# Altium PCB PCB1.PcbDoc
Units mm, origin at the board's own origin, x right, y up, seen from the top; angles counter-clockwise.
Board outline 60 x 46.5 mm, 2 copper layers (Top Layer, Bottom Layer); 46 components, 48 nets, 188 pads, 39 vias.
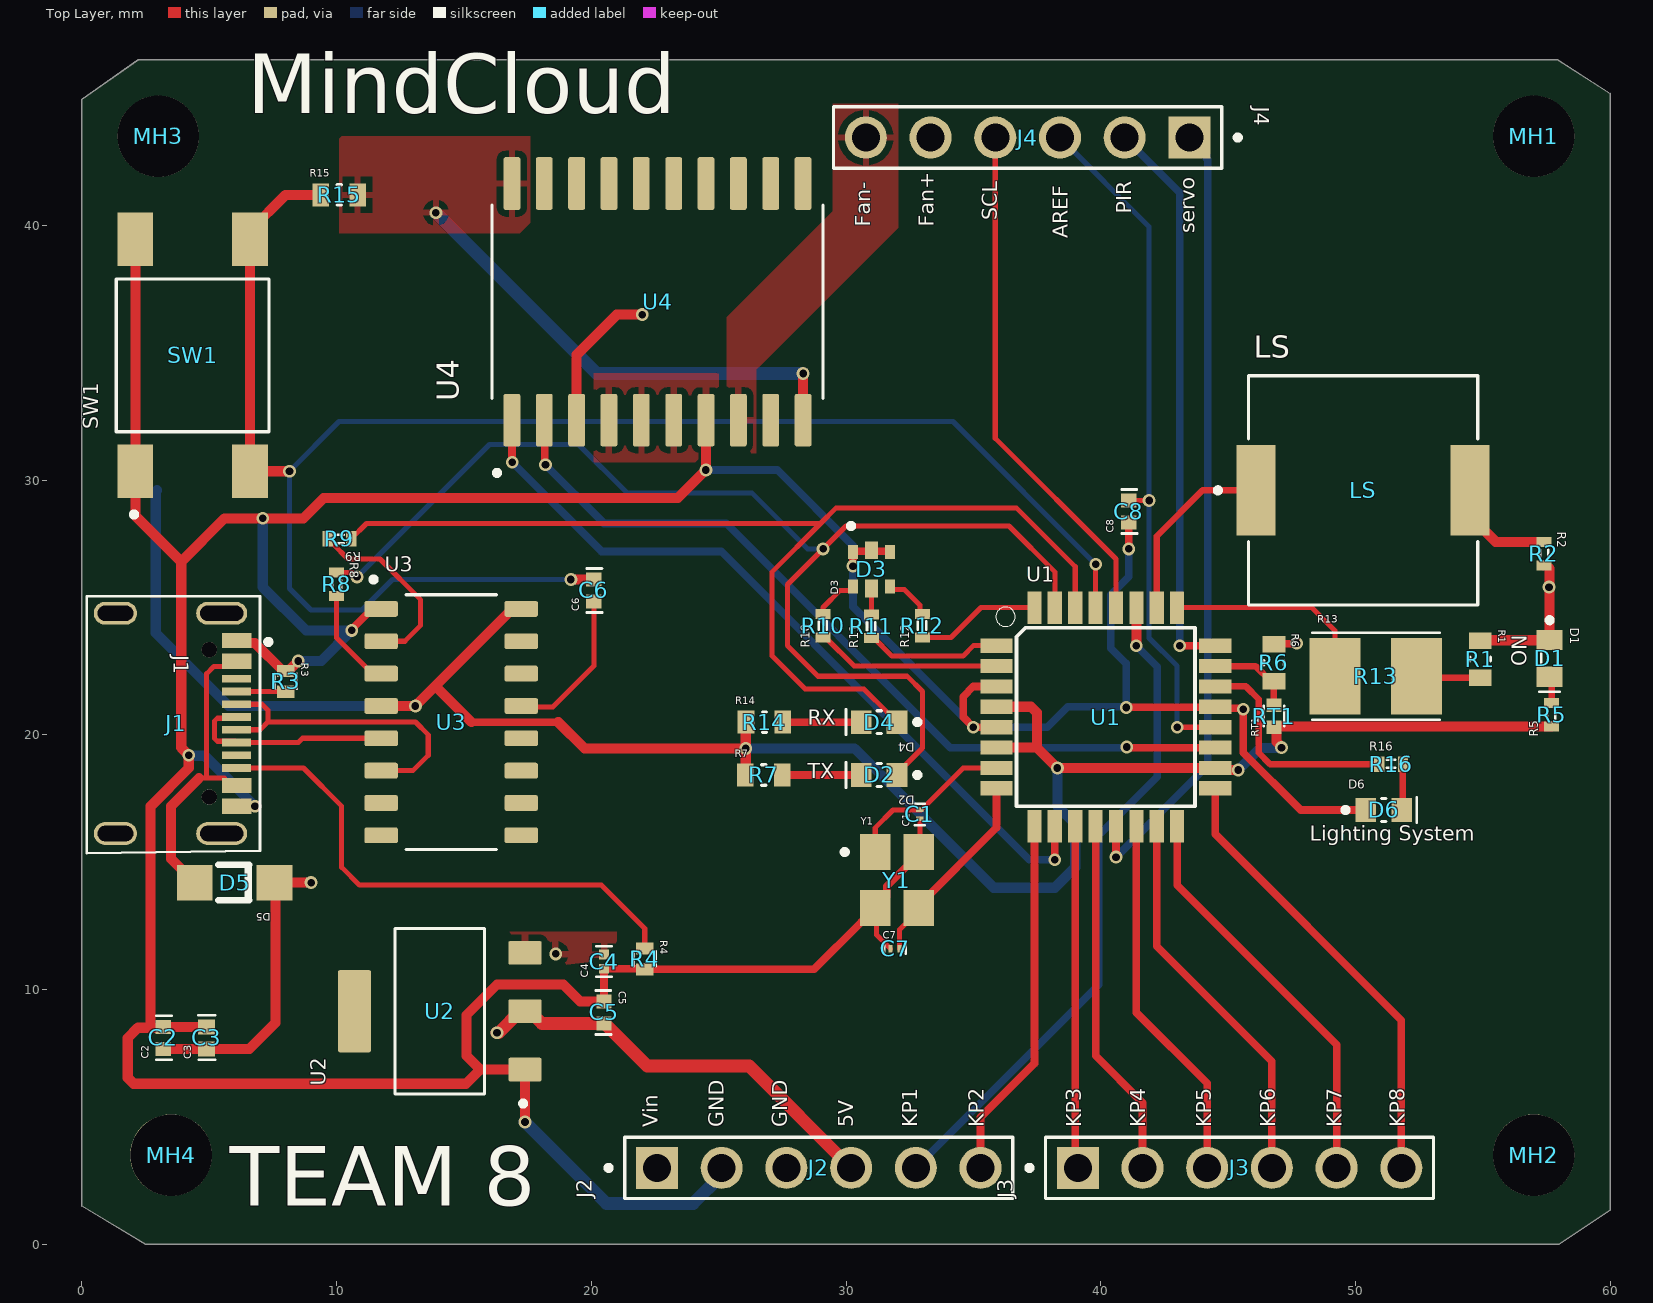
[diagram p0: Top Layer view]
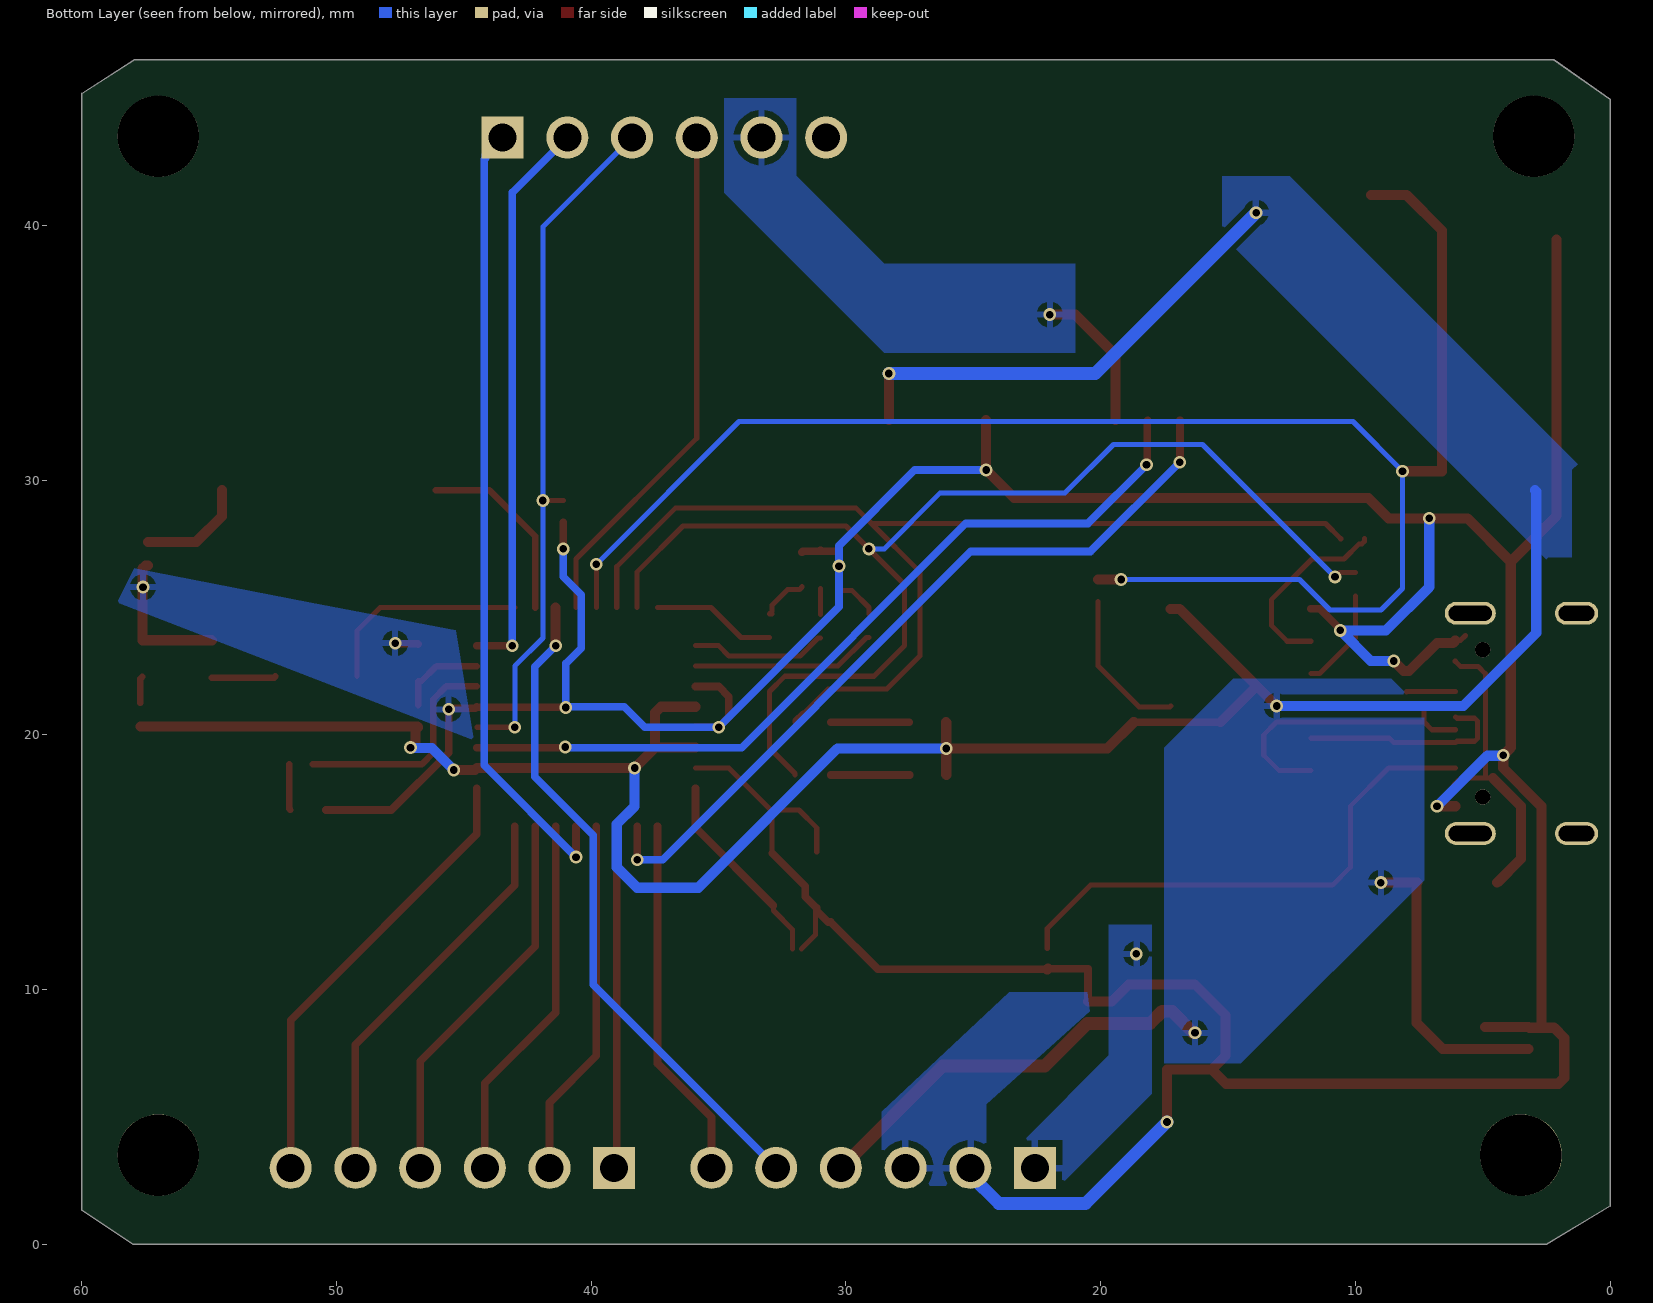
[diagram p1: Bottom Layer view, seen from below]
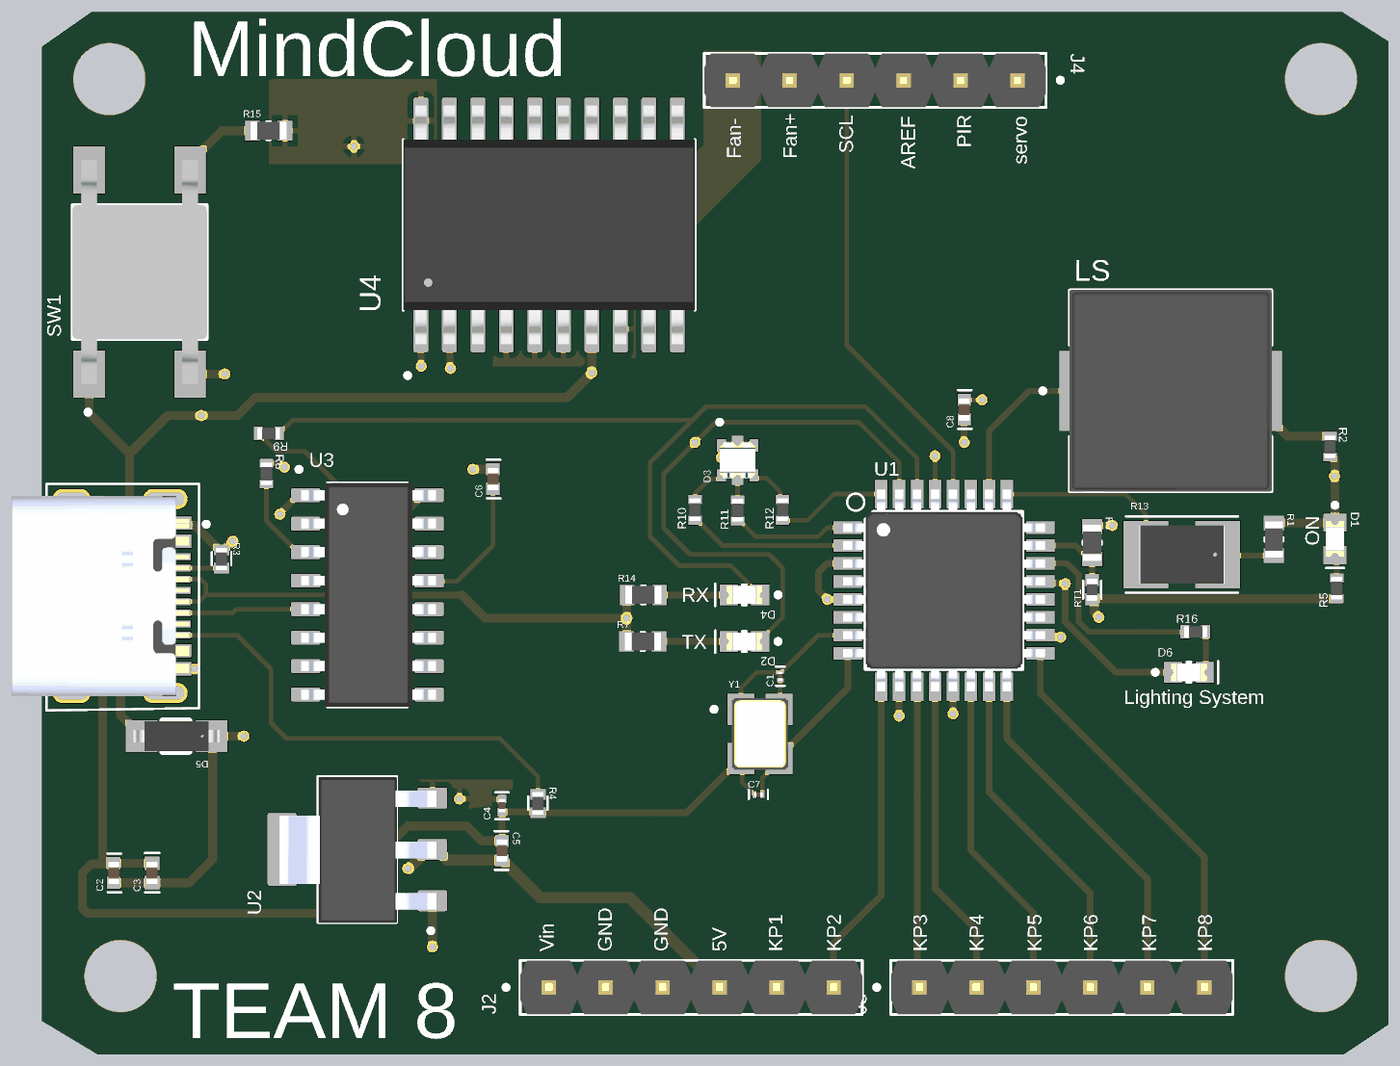
[diagram p2: 3D render of the assembled board from above, using the file's embedded part models]

## Layer stack, top to bottom
Top Solder: solder mask 0.0102, Solder Resist, Dk 3.5
Top Layer: signal copper 0.0356
Dielectric 1: dielectric 0.32, FR-4, Dk 4.8
Bottom Layer: signal copper 0.0356
Bottom Solder: solder mask 0.0102, Solder Resist, Dk 3.5

## Board outline
0,1.5 0,44.95 2.214,46.5 57.929,46.5 60,45.182 60,1.333 58,0 2.5,0

## Design rules (kind name [scope] priority, off if disabled: settings)
Clearance [All] p1: gap=0.1 ignorepadtopadclearanceinfootprint=TRUE except(0.15: SMDPad-SMDPad; 0.2: Arc-Via Track-Via; 0.28: Arc-THPad Track-THPad)
DiffPairsRouting [All] p1: maxlimit=0.254 minlimit=0.254 mostfreqgap=0.254 toplayer_minwidth=0.381 toplayer_maxwidth=0.381 toplayer_prefwidth=0.381 bottomlayer_minwidth=0.381 bottomlayer_maxwidth=0.381 bottomlayer_prefwidth=0.381 maxuncoupledlength=12.7
HoleSize [All] p1: absolutevalues=TRUE maxlimit=6.3 minlimit=0.15 maxpercent=80.000 minpercent=20.000
HoleToHoleClearance [All] p1: gap=0.2 allowstackedmicrovias=TRUE
MinimumSolderMaskSliver [All] p1: minsoldermaskwidth=0.1
PolygonConnect [All] p1: connectstyle=Relief reliefconductorwidth=0.254 reliefentries=4 polygonreliefangle="90 Angle" airgapwidth=0.254
RoutingVias [All] p1: holewidth=0.3 width=0.5 viastyle="Through Hole" minholewidth=0.15 minwidth=0.25 maxholewidth=0.7 maxwidth=0.9
SolderMaskExpansion [All] p1: expansion=0.038 istentingtop=FALSE
SupplyNets "Schematic Supply Nets_2" [InNet('+5')] p1: voltage=0.000
SupplyNets "Schematic Supply Nets_1" [InNet('GND')] p2: voltage=0.000
SupplyNets "Schematic Supply Nets" [InNet('VCC')] p3: voltage=0.000
Width [All] p1: maxlimit=0.5 minlimit=0.1 preferedwidth=0.3
26 further rules are at their usual default settings.

## Classes and differential pairs
differential pair DIFF: +DIFF_P -DIFF_N

## Components (designator, comment, footprint, x,y, rotation, side; value= is the part's Value field where it differs from the comment)
C1 "10pF" CAP10PF 32.9,16.875 r90 top
C2 "0.1uF" CAP0.1UF 3.2,8.1 r90 top
C3 "4.7uF" CAP4.7UF 4.9,8.1 r90 top
C4 "1uF" "CAP 1UF" 20.5,11.1 r90 top
C5 "0.1uF" CAP0.1UF 20.5,9.1 r270 top
C6 "0.1uF" CAP0.1UF 20.1,25.668 r90 top
C7 "10pF" CAP10PF 31.925,11.6 r0 top
C8 "0.1uF" CAP0.1UF 41.1,28.768 r90 top
D1 "yellow" "YELLOW LED" 57.625,23 r270 top
D2 "blue" "RED LED" 31.3,18.425 r180 top
D3 "RGB" "RGB LED" 31,26.5 r90 top
D4 "red" "RED LED" 31.3,20.5 r180 top
D5 "Zener" "ZENER 5.6V" 6,14.2 r180 top
D6 "blue" "RED LED" 51.113,17.05 r0 top
J1 "USB_C Connector" TYPE-C-31-M-12 3.7,20.45 r270 top
J2 "pinheader" "PINHEADER 6 PINS" 28.93,3 r90 top
J3 "pinheader" "PINHEADER 6 PINS" 45.45,3 r90 top
J4 "pinheader" "PINHEADER 6 PINS" 37.13,43.45 r270 top
LS "Buzzer" BUZZERS 50.3,29.6 r0 top
MH1 "mounting hole" "MOUNTING HOLE" 57,43.5 r0 top
MH2 "mounting hole" "MOUNTING HOLE" 57,3.5 r0 top
MH3 "mounting hole" "MOUNTING HOLE" 3,43.5 r0 top
MH4 "mounting hole" "MOUNTING HOLE" 3.5,3.5 r0 top
R1 "10kO" RES10K 54.9,22.975 r270 top
R2 "1kO" RES1K 57.4,27.1 r270 top
R3 "5.1kO" RES5.1KO 8,22.1 r270 top
R4 "5.1kO" RES5.1KO 22.1,11.2 r270 top
R5 "1kO" RES1K 57.7,20.8 r90 top
R6 "10kO" RES10K 46.8,22.825 r270 top
R7 "10kO" RES10K 26.775,18.425 r0 top
R8 "1kO" RES1K 10,25.9 r270 top
R9 "1kO" RES1K 10.1,27.7 r180 top
R10 "1kO" RES1K 29.1,24.3 r90 top
R11 "1kO" RES1K 31,24.275 r90 top
R12 "1kO" RES1K 33,24.3 r90 top
R13 "LDR" "LDR SENSOR" 50.8,22.3 r0 top
R14 "10kO" RES10K 26.8,20.5 r0 top
R15 "10kO" RES10K 10.1,41.2 r0 top
R16 "1kO" RES1K 51.413,18.85 r0 top
RT1 "Temp sensor" "TEMP SENSOR" 46.8,20.732 r90 top
SW1 "RESET" "PUSHBUTTON SWITCH" 4.35,34.9 r90 top
U1 "ATMEGA8A-AU" ATMEGA8A-AU 40.2,20.7 r0 top
U2 "Regulator-5V" REGULATOR-5V 14.05,9.15 r90 top
U3 "USB to UART converter" "USB TO UART CONVERTER" 14.4,20.8 r0 top
U4 "L293D" L293D 22.6,37 r90 top
Y1 "16Mhz" CRYSTAL16MHZ 32,14.3 r0 top

## Footprints (in the part's own frame and the unit in brackets; to place one, negate y for a bottom-side part, rotate by r counter-clockwise, add the part's x,y. Pads: shape width x height; smd on the part's side, far side on the other; paste and mask are expansions set on the pad)
ATMEGA8A-AU [mil] "8KB 1KB FLASH 23 2.7V~5.5V AVR 16MHz TQFP-32(7x7) Microcontrollers (MCU/MPU/SOC) ROHS"
  rect 50x22 smd: 1(-169,110.24) 2(-169,78.74) 3(-169,47.24) 4(-169,15.75) 5(-169,-15.75) 6(-169,-47.24) 7(-169,-78.74) 8(-169,-110.24) 17(169,-110.24) 18(169,-78.74) 19(169,-47.24) 20(169,-15.75) 21(169,15.75) 22(169,47.24) 23(169,78.74) 24(169,110.24)
  rect 22x50 smd: 9(-110.24,-169) 10(-78.74,-169) 11(-47.24,-169) 12(-15.75,-169) 13(15.75,-169) 14(47.24,-169) 15(78.74,-169) 16(110.24,-169) 25(110.24,169) 26(78.74,169) 27(47.24,169) 28(15.75,169) 29(-15.75,169) 30(-47.24,169) 31(-78.74,169) 32(-110.24,169)
  silkscreen extent -170,-138 138,170, body extent -177,-177 177,177, height 47
BUZZERS [mil] "65dB Passive (external drive) Piezoelectric 4kHz Buzzers ROHS"
  rect 60x140 smd: 1(-165.35,0) 2(165.35,0)
  silkscreen extent -228,-177 177,177, body extent -177,-177 177,177, height 75
CAP0.1UF [mm] "50V 100nF X7R ±10% 0402 Multilayer Ceramic Capacitors MLCC - SMD/SMT ROHS"
  rect 0.54x0.6 smd: 1(-0.432,0) 2(0.432,0)
  silkscreen extent -0.86,-0.33 0.86,0.28, body extent -0.5,-0.25 0.5,0.25, height 0.55
CAP4.7UF [mm] "10V 4.7uF X5R ±20% 0402 Multilayer Ceramic Capacitors MLCC - SMD/SMT ROHS"
  rect 0.6x0.67 smd: 1(-0.432,0) 2(0.432,0)
  silkscreen extent -0.86,-0.33 0.89,0.33, body extent -0.5,-0.25 0.5,0.25, height 0.65
CAP10PF [mm] "16V 10pF null ±5% 01005 Multilayer Ceramic Capacitors MLCC - SMD/SMT ROHS"
  rect 0.175x0.3 smd mask+0.038: 1(-0.178,0) 2(0.178,0)
  silkscreen extent -0.43,-0.2 0.42,0.2, body extent -0.2,-0.1 0.2,0.1, height 0.22
"CAP 1UF" [mm] "10V 1uF X5R ±20% 0201 Multilayer Ceramic Capacitors MLCC - SMD/SMT ROHS"
  rect 0.38x0.4 smd: 1(-0.28,0) 2(0.28,0)
  silkscreen extent -0.6,-0.3 0.6,0.3, body extent -0.3,-0.15 0.3,0.15, height 0.35
CRYSTAL16MHZ [mm] "1.8V~3.3V ±10ppm ±20ppm CMOS 16MHz SMD3225-4P Crystal Oscillators ROHS"
  rect 1.2x1.4 smd: 1(-0.85,1.1) 2(-0.85,-1.1) 3(0.85,-1.1) 4(0.85,1.1)
  silkscreen extent -2.15,1 -1.95,1.2, body extent -1.25,-1.6 1.25,1.6, height 0.8
L293D [mm] "SOIC-20-300mil Stepper Motor Driver ROHS"
  rrect25% 2.07x0.66 smd: 1(-4.645,5.715) 2(-4.645,4.445) 3(-4.645,3.175) 4(-4.645,1.905) 5(-4.645,0.635) 6(-4.645,-0.635) 7(-4.645,-1.905) 8(-4.645,-3.175) 9(-4.645,-4.445) 10(-4.645,-5.715) 11(4.645,-5.715) 12(4.645,-4.445) 13(4.645,-3.175) 14(4.645,-1.905) 15(4.645,-0.635) 16(4.645,0.635) 17(4.645,1.905) 18(4.645,3.175) 19(4.645,4.445) 20(4.645,5.715)
  silkscreen extent -6.81,-6.5 3.8,6.5, body extent -5.32,-6.5 5.32,6.5, height 2.64
"LDR SENSOR" [mm] "SMD,2.4x3.6mm Photoresistors ROHS"
  rect 2x3 smd: 1(-1.6,0) 2(1.6,0)
  silkscreen extent -2.5,-1.7 2.5,1.7, body extent -1.91,-1.3 1.91,1.3, height 0.66
"MOUNTING HOLE" [mm] "mounting hole 3.2mm inner diameter and 5.6mm outer"
  round 3.2 hole 3.2 paste-2539.97 mask-2539.97: 1(0,0)
"PINHEADER 6 PINS" [mm] "3A Direct Insert Policy 2.54mm 6P 5.84mm -65℃~+125℃ 3.05mm 2.54mm Single Row Phosphor Bronze Black Plugin,P=2.54mm Pin Headers ROHS"
  rect 1.65x1.65 / inner round 1.65 / far side rect 1.65x1.65 hole 1.1: 1(0,6.35)
  round 1.65 hole 1.1: 2(0,3.81) 3(0,1.27) 4(0,-1.27) 5(0,-3.81) 6(0,-6.35)
  silkscreen extent -1.2,-7.62 1.2,8.35, body extent -1.2,-7.62 1.2,7.62, height 8.38
"PUSHBUTTON SWITCH" [mm] "6mm 5mm Round Button 50mA Standing paste 6mm SPST 24V SMD Tactile Switches ROHS"
  rect 2.1x1.4 smd: 1(-4.55,2.25) 2(4.55,2.25) 3(-4.55,-2.25) 4(4.55,-2.25)
  silkscreen extent -6.35,-3 3,3, body extent -5,-3 5,3, height 5.07
"RED LED" [mm] "20mA 99mcd Colorless transparent lens -30℃~+85℃ 631nm Red 130° 62.5mW 2V 0603 LED Indication - Discrete ROHS"
  rect 0.81x0.93 smd: A(0.7,0) C(-0.7,0)
  silkscreen extent -1.6,-0.5 1.3,0.5, body extent -0.8,-0.4 0.8,0.4, height 0.8
REGULATOR-5V [mm] "1A 60dB@(120Hz) Fixed 5V Positive electrode 12V SOT-223 Voltage Regulators - Linear, Low Drop Out (LDO) Regulators ROHS"
  rrect15% 0.93x1.31 smd: 1(-2.29,-3.345) 2(0,-3.345) 3(2.29,-3.345)
  rrect15% 3.24x1.31 smd: 4(0,3.345)
  silkscreen extent -3.72,-3.37 3.25,1.75, body extent -3.28,-3.52 3.23,3.47, height 1.8
RES1K [mm] "100mW Thick Film Resistors ±100ppm/℃ ±1% 1kΩ 0402 Chip Resistor - Surface Mount ROHS"
  rect 0.4x0.6 smd: 1(-0.475,0) 2(0.45,0)
  silkscreen extent -0.18,-0.15 0.15,0.18, body extent -0.5,-0.25 0.5,0.25, height 0.35
RES5.1KO [mil] "100mW Thick Film Resistors ±5% ±200ppm/℃ 5.1kΩ 0402 Chip Resistor - Surface Mount ROHS"
  rect 18.7x27 smd: 1(-16,0) 2(16,0)
  silkscreen extent -12,-17 11,17, body extent -20,-10 20,10, height 14
RES10K [mm] "100mW Thick Film Resistors ±100ppm/℃ ±1% 10kΩ 0603 Chip Resistor - Surface Mount ROHS"
  rect 0.65x0.9 smd: 1(-0.725,0) 2(0.725,0)
  silkscreen extent -0.08,-0.4 0.08,0.4, body extent -0.8,-0.4 0.8,0.4, height 0.45
"RGB LED" [mm] "0606 RGB LEDs ROHS"
  rect 0.55x0.4 smd: 1(0.675,0.725) 2(-0.675,0.725) 5(0.675,-0.725) 6(-0.675,-0.725)
  rect 0.7x0.5 smd: 3(0.75,0) 4(-0.75,0)
  silkscreen extent 1.6,0.7 1.8,0.9, body extent -0.8,-0.8 0.8,0.8, height 0.5
"TEMP SENSOR" [mm] "100kΩ 32uA ±0.5% 4250K ±0.5% 0402 NTC Thermistors ROHS"
  rect 0.54x0.6 smd: 1(-0.432,0) 2(0.432,0)
  silkscreen extent -0.4,-0.4 0.4,0.4, body extent -0.5,-0.25 0.5,0.25, height 0.55
TYPE-C-31-M-12 [mm] "5A 1 16P Female Type-C SMD USB Connectors ROHS"
  rect 0.6x1.14 smd mask+0.05: A1_B12(-3.251,2.381) A4_B9(-2.438,2.381) B1_A12(3.251,2.381) B4_A9(2.438,2.381)
  rect 0.3x1.14 smd mask+0.05: A5(-1.25,2.369) A6(-0.25,2.369) A7(0.25,2.369) A8(1.25,2.369) B5(1.75,2.369) B6(0.75,2.369) B7(-0.75,2.369) B8(-1.75,2.369)
  oval 0.9x2 hole 0.6 slot 1.7 at 90 deg: S1(-4.325,1.789) S2(4.325,1.789)
  oval 0.9x1.7 hole 0.6 slot 1.4 at 90 deg: S3(-4.325,-2.381) S4(4.325,-2.381)
  round 0.6 hole 0.6 unplated: ""(-2.89,1.299) ""(2.89,1.299)
  silkscreen extent -5,-3.51 5.1,3.72, body extent -4.47,-5.04 4.47,2.86, height 3.31
"USB TO UART CONVERTER" [mm] "2Mbps Transceiver USB 2.0 SOP-16 USB Converters ROHS"
  rrect25% 1.31x0.62 smd: 1(-2.65,4.145) 2(-2.65,2.875) 3(-2.65,1.605) 4(-2.65,0.335) 5(-2.65,-0.935) 6(-2.65,-2.205) 7(-2.65,-3.475) 8(-2.65,-4.745) 9(2.85,-4.745) 10(2.85,-3.475) 11(2.85,-2.205) 12(2.85,-0.935) 13(2.85,0.335) 14(2.85,1.605) 15(2.85,2.875) 16(2.85,4.145)
  silkscreen extent -3.05,-5.3 1.88,5.4, body extent -2.85,-5.3 3.15,4.7, height 1.8
"YELLOW LED" [mm] "20mA 6mcd Colorless transparent lens -55℃~+85℃ 569nm Yellow Green 130° 100mW 2.1V 0603 LED Indication - Discrete ROHS"
  rect 0.8x1.016 smd: A(0.725,0) C(-0.725,0)
  silkscreen extent -1.6,-0.4 1.3,0.4, body extent -0.8,-0.4 0.8,0.4, height 0.8
"ZENER 5.6V" [mm] "Independent Type 5.2V~6V 500mW 5.6V SOD-123 Zener Diodes ROHS"
  rect 1.4x1.4 smd: 1(-1.562,0) 2(1.562,0)
  silkscreen extent -0.67,-0.7 0.64,0.7, body extent -1.92,-0.67 1.92,0.67, height 0.81

## Part data
C1 C7: library part Cap10pF, "16V 10pF null ±5% 01005 Multilayer Ceramic Capacitors MLCC - SMD/SMT ROHS", Manufacrurar="Murata Electronics", Manufacturer Part Number=GRM0225C1C100JA03L, Supplier Part Number=C710762, Supplier=LCSC
C2 C5 C6 C8: library part "Cap 0.1uF", "50V 100nF X7R ±10% 0402 Multilayer Ceramic Capacitors MLCC - SMD/SMT ROHS", Manufacrurar="Murata Electronics", Manufacturer Part Number=GRM155R71H104KE14D, Supplier Part Number=C77020, Supplier=LCSC
C3: library part "Cap 4.7uF", "10V 4.7uF X5R ±20% 0402 Multilayer Ceramic Capacitors MLCC - SMD/SMT ROHS", Manufacrurar="Murata Electronics", Manufacturer Part Number=GRM155R61A475MEAAD, Supplier Part Number=C335105, Supplier=LCSC
C4: library part "Cap 1uF", "10V 1uF X5R ±20% 0201 Multilayer Ceramic Capacitors MLCC - SMD/SMT ROHS", Manufacrurar="Murata Electronics", Manufacturer Part Number=GRM033R61A105ME44D, Supplier Part Number=C76935, Supplier=LCSC
D1: library part "yellow LED", "20mA 6mcd Colorless transparent lens -55℃~+85℃ 569nm Yellow Green 130° 100mW 2.1V 0603 LED Indication - Discrete ROHS", Manufacrurar=Lite-On, Manufacturer Part Number=LTST-C190GKT, Supplier Part Number=C125093, Supplier=LCSC
D2 D6: library part "blue LED", "20mA 104mcd Colorless transparent lens -20℃~+80℃ 465nm~475nm Blue 130° 76mW 3.3V 0805 LED Indication - Discrete ROHS", Manufacrurar=Lite-On, Manufacturer Part Number=LTST-C170TBKT, Supplier Part Number=C98222, Supplier=LCSC
D3: library part "RGB LED", "0606 RGB LEDs ROHS", Manufacrurar="Everlight Elec", Manufacturer Part Number=19-337C/RSBHGHC-A88/4T, Supplier Part Number=C3019536, Supplier=LCSC
D4: library part "red LED", "20mA 99mcd Colorless transparent lens -30℃~+85℃ 631nm Red 130° 62.5mW 2V 0603 LED Indication - Discrete ROHS", Manufacrurar=Lite-On, Manufacturer Part Number=LTST-C190KRKT, Supplier Part Number=C94869, Supplier=LCSC
D5: library part "Zener 5.6V", "Independent Type 5.2V~6V 500mW 5.6V SOD-123 Zener Diodes ROHS", Manufacturer="Diodes Incorporated", Manufacturer Part Number=BZT52C5V6-7-F, Supplier Part Number=C397930, Supplier=LCSC
J1: library part TYPE-C-31-M-12, "5A 1 16P Female Type-C SMD USB Connectors ROHS", Manufacturer="Korean Hroparts Elec", Supplier Part Number=C165948, Manufacturar Part Number=TYPE-C-31-M-12, Supplier=LCSC
J2 J3 J4: library part "pinheader 6 pins", "3A Direct Insert Policy 2.54mm 6P 5.84mm -65℃~+125℃ 3.05mm 2.54mm Single Row Phosphor Bronze Black Plugin,P=2.54mm Pin Headers ROHS", Manufacrurar="Amphenol ICC", Manufacturer Part Number=68001-106HLF, Supplier Part Number=C3330006, Supplier=LCSC
LS: library part Buzzers, "65dB Passive (external drive) Piezoelectric 4kHz Buzzers ROHS", Manufacrurar="Murata Electronics", Manufacturer Part Number=PKMCS0909E4000-R1, Supplier Part Number=C910763, Supplier=LCSC
MH1 MH2 MH3 MH4: "mounting hole 3.2mm inner diameter and 5.6mm outer"
R1 R6 R7 R14 R15: library part "Res 10k", "100mW Thick Film Resistors ±100ppm/℃ ±1% 10kΩ 0603 Chip Resistor - Surface Mount ROHS", Manufacrurar=PANASONIC, Manufacturer Part Number=ERJ3EKF1002V, Supplier Part Number=C191124, Supplier=LCSC
R2 R5 R8 R9 R10 R11 R12 R16: library part "Res 1k", "100mW Thick Film Resistors ±100ppm/℃ ±1% 1kΩ 0402 Chip Resistor - Surface Mount ROHS", Manufacrurar=PANASONIC, Manufacturer Part Number=ERJ2RKF1001X, Supplier Part Number=C191124, Supplier=LCSC
R3 R4: library part Res5.1kO, "100mW Thick Film Resistors ±5% ±200ppm/℃ 5.1kΩ 0402 Chip Resistor - Surface Mount ROHS", Manufacrurar=PANASONIC, Manufacturer Part Number=ERJ2GEJ512X, Supplier Part Number=C413002, Supplier=LCSC
R13: library part "LDR sensor", "SMD,2.4x3.6mm Photoresistors ROHS", Manufacrurar="JCHL(Shenzhen Jing Chuang He Li Tech)", Manufacturer Part Number=GT36528, Supplier Part Number=C2904881, Supplier=LCSC
RT1: "100kΩ 32uA ±0.5% 4250K ±0.5% 0402 NTC Thermistors ROHS", Manufacrurar="Murata Electronics", Manufacturer Part Number=NCU15WF104D60RC, Supplier Part Number=C426654, Supplier=LCSC
SW1: library part "Pushbutton Switch", "6mm 5mm Round Button 50mA Standing paste 6mm SPST 24V SMD Tactile Switches ROHS", Manufacrurar="TE Connectivity", Manufacturer Part Number=4-1437565-2, Supplier Part Number=C86487, Supplier=LCSC
U1: "8KB 1KB FLASH 23 2.7V~5.5V AVR 16MHz TQFP-32(7x7) Microcontrollers (MCU/MPU/SOC) ROHS", Manufacrurar="Microchip Tech", Supplier Part Number=C16190, Manufacturer Part Number=ATMEGA8A-AU, Supplier=LCSC
U2: "1A 60dB@(120Hz) Fixed 5V Positive electrode 12V SOT-223 Voltage Regulators - Linear, Low Drop Out (LDO) Regulators ROHS", Manufacrurar="UMW(Youtai Semiconductor Co., Ltd.)", Manufacturer Part Number=AMS1117-5.0, Supplier Part Number=C347223, Supplier=LCSC
U3: "2Mbps Transceiver USB 2.0 SOP-16 USB Converters ROHS", Manufacrurar="WCH(Jiangsu Qin Heng)", Manufacturer Part Number=CH340C, Supplier Part Number=C84681, Supplier=LCSC
U4: "SOIC-20-300mil Stepper Motor Driver ROHS", Manufacrurar=STMicroelectronics, Manufacturer Part Number=L293DD013TR, Supplier Part Number=C21610, Supplier=LCSC
Y1: library part Crystal16Mhz, "1.8V~3.3V ±10ppm ±20ppm CMOS 16MHz SMD3225-4P Crystal Oscillators ROHS", Manufacrurar="YXC Crystal Oscillators", Manufacturer Part Number=OT2EL4C4JI-111OLP-16M, Supplier Part Number=C5189452, Supplier=LCSC

## Via types
v1: diameter 0.5, hole 0.3, Top Layer to Bottom Layer, 39 vias

## Nets (pads, with @x,y where several pads share a name; then routed paths per layer and width w, separated by ;. In a path a pad name is that pad's centre, name@x,y a point inside that pad or via, vN(x,y) a via of type N, cw(c..) or ccw(c..) an arc to the next point about the centre after c; other vN are vias at no path point)
+5: C2.1 C3.1 C5.2 D5.1 J2.4 R5.1 R7.1 R14.1 R15.2 RT1.1 U1.4 U1.6 U1.18 U2.2 U3.4 U3.16 U4.10 U4.20 | length 133.4
  Top Layer w0.3: 15.3,20.5 18.7,20.5
  Top Layer w0.4: C2.1 C3.1 6.568,7.668 7.6,8.7 7.6,14.162 D5.1 v1(9,14.2) ; U3.4 v1(13.095,21.135) 13.88,21.92 ; 15.3,20.5 13.88,21.92 ; U3.16 16.905,24.945 13.88,21.92 ; 18.7,20.5 19.738,19.462 v1(26.062,19.462) ; R7.1 26.062,18.437 v1(26.062,19.462) ; R14.1 26.062,20.487 v1(26.062,19.462) ; v1@28.3,34.2 v1(28.315,34.185) U4.10 ; U1.6 37.5,19.5 ; U1.4 37.266,21.1 37.5,20.866 37.5,19.5 ; v1(45.4,18.621) 44.572,18.621 U1.18 v1(38.3,18.7) 37.5,19.5 ; v1(47.1,19.5) 47.1,19.527 46.9,19.727 46.9,20.23 46.83,20.3 RT1.1 46.825,20.325 R5.1
  Top Layer w0.5: v1(16.3,8.3) 16.355,8.3 17.205,9.15 U2.2 17.585,9.15 18.067,8.668 C5.2 20.53,8.668 22.198,7 26.2,7 J2.4
  Bottom Layer w0.4: 2.95,29.6 2.9,29.55 2.9,24 5.765,21.135 v1(13.095,21.135) ; v1(26.062,19.462) 30.338,19.462 35.8,14 38.2,14 39,14.8 39,16.5 38.3,17.2 v1(38.3,18.7) ; v1(45.4,18.621) 46.26,19.481 47.081,19.481 v1(47.1,19.5)
  Bottom Layer w0.5: v1(13.9,40.5) 20.215,34.185 v1(28.315,34.185)
A0/TMP: R6.2 RT1.2 U1.23 | length 3.5
  Top Layer w0.254: U1.23 46.075,22.7 46.675,22.1 R6.2 RT1.2
A1/PIR: J4.2 U1.24 | length 22.2
  Top Layer w0.3: v1(43.1,23.5) U1.24
  Bottom Layer w0.3: J4.2 43.1,41.29 v1(43.1,23.5)
A2: R13.1 U1.25 | length 8.4
  Top Layer w0.2: U1.25 48.293,24.993 49.2,24.085 R13.1
A3: LS.1 U1.26 | length 7.5
  Top Layer w0.254: U1.26 42.2,27.8 44,29.6 LS.1
A4/KP1: J2.5 U1.27 | length 26.3
  Top Layer w0.4: v1(41.4,23.5) U1.27
  Bottom Layer w0.3: J2.5 39.925,10.185 39.925,16.05 42.225,18.35 42.225,22.675 v1(41.4,23.5)
AREF: C8.2 J4.3 U1.20 | length 27.3
  Top Layer w0.2: C8.2 v1(41.9,29.2) ; v1(43,20.3) U1.20
  Bottom Layer w0.2: J4.3 41.9,39.95 v1(41.9,29.2) 41.9,23.8 43,22.7 v1(43,20.3)
D0/RX: D4.C R9.1 U1.30 | length 43.5
  Top Layer w0.2: R9.1 11.175,28.3 29,28.3 ; D4.C 32,20.56 31.695,20.865 31.635,20.865 30.7,21.8 28.4,21.8 27.1,23.1 27.1,26.4 29,28.3 ; U1.30 39,26.6 36.7,28.9 29.6,28.9 29,28.3
D1/TX: D2.C R8.1 U1.31 | length 48.8
  Top Layer w0.2: R8.1 10.625,26.375 v1(10.8,26.2) ; D2.C 32,18.485 33,19.485 33,21.7 32.4,22.3 28.9,22.3 27.7,23.5 27.7,25.9 v1(29.1,27.3) 30,28.2 36.4,28.2 38.2,26.4 U1.31
  Bottom Layer w0.2: v1(10.8,26.2) 16,31.4 19.5,31.4 21.4,29.5 26.3,29.5 28.5,27.3 v1(29.1,27.3)
D2: R12.1 U1.32 | length 4.9
  Top Layer w0.2: R12.1 34.125,23.825 35.3,25 37.393,25 U1.32
D3: R11.1 U1.1 | length 5.4
  Top Layer w0.2: R11.1 31.1,23.8 31.8,23.1 34.6,23.1 35,23.5 U1.1
D4: R10.1 U1.2 | length 7.3
  Top Layer w0.2: R10.1 29.2,23.825 30.325,22.7 U1.2
D5/KP2: J2.6 U1.9 | length 14.3
  Top Layer w0.3: J2.6 35.28,4.98 37.4,7.1 U1.9
D6/motorEnable: U1.10 U4.1 | length 30.7
  Top Layer w0.3: U4.1 16.885,30.715 v1(16.9,30.7) ; v1(38.2,15.1) U1.10
  Bottom Layer w0.3: v1(16.9,30.7) 20.4,27.2 25.1,27.2 37.2,15.1 v1(38.2,15.1)
D7/KP3: J3.1 U1.11 | length 13.4
  Top Layer w0.3: U1.11 39,3.1 J3.1
D8/KP4: J3.2 U1.12 | length 14.2
  Top Layer w0.3: U1.12 39.8,7.4 41.64,5.56 J3.2
D9/servoEnable: J4.1 U1.13 | length 31.2
  Top Layer w0.3: v1(40.6,15.2) U1.13
  Bottom Layer w0.3: v1(40.6,15.2) 44.2,18.8 44.2,42.599 44.155,42.644 44.155,42.775 J4.1
D10/KP5: J3.3 U1.14 | length 14.6
  Top Layer w0.3: U1.14 41.4,9.1 44.18,6.32 J3.3
D11/KP6: J3.4 U1.15 | length 15.3
  Top Layer w0.3: U1.15 42.2,11.7 46.72,7.18 J3.4
D12/KP7: J3.5 U1.16 | length 16
  Top Layer w0.3: U1.16 43,14.1 49.26,7.84 J3.5
D13/KP8: J3.6 U1.17 | length 17.9
  Top Layer w0.3: U1.17@44.5,17.893 U1.17 44.493,16.107 51.8,8.8 J3.6
DIFF_N: J1.A7 J1.B7 U3.6 | length 12.6
  Top Layer w0.2: J1.A7 7,20.2 7.3,20.5 ; J1.B7 7.077,21.2 7.3,20.977 7.3,20.5 ; U3.6 12.995,18.595 13.6,19.2 13.6,20 13.1,20.5 7.3,20.5
DIFF_P: J1.A6 J1.B6 U3.5 | length 8.3
  Top Layer w0.2: J1.A6 6.019,20.65 5.317,20.65 5.2,20.533 5.2,19.867 5.317,19.75 6.019,19.75 J1.B6 8.5,19.7 8.665,19.865 U3.5
Fan+: J4.5 U4.3 | length 5.8
  Top Layer w0.4: U4.3 19.425,34.925 21,36.5 v1(22,36.5)
Fan-: J4.6 U4.8
GND: C1.1 C2.2 C3.2 C4.1 C5.1 C7.1 C8.1 D1.C D3.1 D3.3 D3.5 D6.C J1.A1_B12 J1.B1_A12 J2.2 J2.3 R1.1 R2.2 R3.1 R4.2 R6.1 SW1.1 SW1.2 U1.3 U1.5 U1.21 U2.1 U3.1 U4.4 U4.5 U4.6 U4.7 Y1.2 Y1.4 | length 190.3
  Top Layer w0.2: J1.A1_B12@5.681,23.901 5.881,23.701 J1.A1_B12 ; Y1.2@31.2,13.15 31.2,12.15 C7.1@31.75,11.6 ; Y1.4@32.9,15.35 C1.1@32.9,16.7
  Top Layer w0.3: v1(10.6,24.1) 10.6,24.14 11.405,24.945 U3.1 ; C5.1 C4.1 R4.2@22.074,10.82 ; R4.2 28.744,10.794 30.6,12.65 30.7,12.65 31.15,13.1 Y1.2 31.6,13.65 31.6,14.05 Y1.4@32.9,15.35 ; v1(24.5,30.4) v1@24.505,30.405 ; v1(30.275,26.625) D3.1 30.312,27.212 30.962,27.212 D3.3 31.037,27.212 31.687,27.212 D3.5 ; U1.5 v1(35,20.3) 34.6,20.7 34.6,21.5 35,21.9 U1.3 ; v1(41,21.075) 41.012,21.087 44.48,21.087 U1.21 44.554,21.038 45.562,21.038 v1(45.6,21) 45.6,19.3 47.85,17.05 D6.C ; v1(41.1,27.3) C8.1 ; R6.1 46.825,23.575 47.675,23.575 v1(47.7,23.6)
  Top Layer w0.4: SW1.2 SW1.1 2.1,28.6 3.901,26.799 ; 3.9,24.2 3.9,19.5 v1(4.2,19.2) ; 3.901,24.2 3.901,26.799 ; v1@4.199,19.2 4.199,18.699 2.7,17.2 2.7,8.516 2.684,8.5 ; C3.2 C2.2 3.168,8.5 2.684,8.5 ; J1.A1_B12 6.181,23.601 6.8,23.601 7.895,22.506 R3.1 8.105,22.506 v1(8.499,22.9) ; J1.B1_A12 v1@6.799,17.199 ; v1(17.4,4.8) 17.395,4.805 U2.1 15.64,6.86 ; C5.1 19.568,9.532 18.9,10.2 16.3,10.2 15.1,9 15.1,7.4 15.64,6.86 ; R4.2@22.074,10.82 R4.2 ; v1(24.5,30.4) 23.4,29.3 9.5,29.3 8.7,28.5 v1(7.1,28.5) 5.602,28.5 3.901,26.799 ; v1@24.505,30.405 U4.7 ; R1.1 54.913,23.712 57.613,23.712 D1.C 57.625,26.525 57.5,26.65 R2.2 ; 2.684,8.5 2.2,8.5 1.8,8.1 1.8,6.534 2.034,6.3 15.08,6.3 15.64,6.86
  Bottom Layer w0.3: v1(24.5,30.4) 27.3,30.4 30.275,27.425 v1(30.275,26.625) 30.275,25.025 v1(35,20.3) 37.9,20.3 38.7,21.1 40.975,21.1 v1(41,21.075) 41,22.8 40.4,23.4 40.4,25.5 41.1,26.2 v1(41.1,27.3)
  Bottom Layer w0.4: v1(4.2,19.2) 4.219,19.181 4.819,19.181 v1(6.8,17.2) ; v1(7.1,28.5) 7.1,25.8 8.8,24.1 v1(10.6,24.1) 9.4,22.9 v1(8.499,22.9)
  Bottom Layer w0.5: v1(17.4,4.8) 20.6,1.6 24,1.6 25.12,2.72 J2.2
  other v1: 57.6,25.8
L293INPUT1: U1.19 U4.2 | length 32.7
  Top Layer w0.3: U4.2 18.177,32.332 18.177,30.622 v1(18.2,30.6) ; v1(41.025,19.525) 41.05,19.5 U1.19
  Bottom Layer w0.3: v1(18.2,30.6) 20.5,28.3 25.3,28.3 34.1,19.5 41,19.5 v1(41.025,19.525)
"Lighting System": R16.1 U1.22 | length 8.9
  Top Layer w0.254: U1.22 45.7,21.9 46.2,21.4 46.2,19.3 46.65,18.85 R16.1
NetC1_2: C1.2 U1.7 Y1.1 | length 6.7
  Top Layer w0.2: Y1.1 31.15,16.35 31.85,17.05 32.9,17.05 32.95,17.05 34.6,18.7 U1.7
NetC6_1: C6.1 U3.13 | length 6.1
  Top Layer w0.2: U3.13 17.285,21.1 18.5,21.1 20.1,22.7 C6.1
NetC7_2: C7.2 U1.8 Y1.3 | length 7.9
  Top Layer w0.2: C7.2@32.1,11.6 32.1,12.35 32.85,13.1 Y1.3 Y1.3@32.85,13.3
  Top Layer w0.3: Y1.3@32.85,13.3 35.907,16.357 U1.8
NetD1_A: D1.A R5.2 | length 1.1
  Top Layer w0.254: D1.A 57.7,22.2 R5.2
NetD2_A: D2.A R7.2 | length 3.1
  Top Layer w0.3: R7.2 D2.A
NetD3_2: D3.2 R10.2 | length 1.8
  Top Layer w0.2: R10.2 29.1,25 29.775,25.675 30.175,25.675 30.275,25.775 D3.2
NetD3_4: D3.4 R11.2 | length 1
  Top Layer w0.2: R11.2 D3.4
NetD3_6: D3.6 R12.2 | length 2
  Top Layer w0.2: D3.6 31.725,25.8 31.825,25.7 32.3,25.7 32.9,25.1 32.9,24.85 R12.2 R12.2@32.9,24.75
NetD4_A: D4.A R14.2 | length 3.1
  Top Layer w0.3: R14.2 D4.A
NetD6_A: D6.A R16.2 | length 1.8
  Top Layer w0.254: D6.A 51.862,17.1 R16.2
NetJ1_A5: J1.A5 R3.2 | length 1.9
  Top Layer w0.2: J1.A5 6.072,21.697 7.997,21.697 R3.2
NetJ1_B5: J1.B5 R4.1 | length 20.8
  Top Layer w0.2: J1.B5 8.7,18.7 10.2,17.2 10.2,14.8 10.9,14.1 20.4,14.1 22.1,12.4 R4.1
NetLS_2: LS.2 R2.1 | length 4.3
  Top Layer w0.4: LS.2 54.5,28.584 55.509,27.575 R2.1
NetR1_2: R1.2 R13.2 | length 2.5
  Top Layer w0.254: R13.2 52.45,22.25 R1.2
NetR8_2: R8.2 U3.3 | length 4
  Top Layer w0.2: R8.2 10,23.81 11.405,22.405 U3.3
NetR9_2: R9.2 U3.2 | length 7.5
  Top Layer w0.2: R9.2 9.65,27.6 9.75,27.5 9.85,27.5 10.45,26.9 11.7,26.9 13.3,25.3 13.3,24.3 12.675,23.675 U3.2
RST: C6.2 R15.1 SW1.3 SW1.4 U1.29 | length 68.2
  Top Layer w0.2: U1.29 v1(39.8,26.7)
  Top Layer w0.4: v1(8.15,30.35) SW1.3 SW1.4 6.6,39.8 8,41.2 R15.1 ; v1(19.2,26.1) C6.2
  Bottom Layer w0.2: v1(19.2,26.1) 12.2,26.1 11,24.9 9,24.9 8.15,25.75 v1(8.15,30.35) 10.1,32.3 34.2,32.3 v1(39.8,26.7)
SCL: J4.4 U1.28 | length 20.4
  Top Layer w0.2: J4.4 35.86,31.64 40.6,26.9 U1.28
VBUS: D5.2 J1.A4_B9 J1.B4_A9 | length 12
  Top Layer w0.2: 4.6,18.3 4.9,18.3 ; J1.B4_A9@5.931,18.162 5.731,18.162 5.593,18.3 4.9,18.3 ; J1.A4_B9 5.881,22.688 5.188,22.688 4.9,22.4 4.9,18.3
  Top Layer w0.3: J1.B4_A9@5.931,18.162 J1.B4_A9
  Top Layer w0.4: D5.2 3.5,15.138 3.5,17.2 4.6,18.3
VCC: C4.2 J2.1 U2.3
  other v1: 18.6,11.4
pads on no net: J1. J1.A8 J1.B8 J1.S1 J1.S2 J1.S3 J1.S4 MH1.1 MH2.1 MH3.1 MH4.1 U2.4 U3.7 U3.8 U3.9 U3.10 U3.11 U3.12 U3.14 U3.15 U4.9 U4.11 U4.12 U4.13 U4.14 U4.15 U4.16 U4.17 U4.18 U4.19

## Polygon pours and split planes (outlines as drawn)
Fan+ on Bottom Layer "FAN+_L02_P018" (solid, pour order 18): 28.5,35 34.775,41.275 34.775,45 31.95,45 31.95,41.95 28.5,38.5 21,38.5 21,35 21,38.5 21,35
GND on Bottom Layer "GND_L02_P003" (solid, pour order 3): 28.5,2.3 28.6,2.4 28.6,5.2 23.587,9.9 20.527,9.9 20.424,9.148 24.5,5.49 24.5,2.3
VCC on Bottom Layer "VCC_L02_P002" (solid, pour order 2): 23.4,2.2 23.4,3.7 19.675,7.425 19.675,12.55 18,12.55 18,5.9 21.7,2.2
GND on Bottom Layer "GND_L02_P008" (solid, pour order 8): 58.6,25.2 57.95,26.55 51.1,25.2 45.312,24.097 44.625,19.8
+5 on Bottom Layer "+5_L02_P020" (solid, pour order 20): 15.225,41.925 15.225,39.625 2.5,26.9 2.425,26.975 1.5,26.975 1.5,30.4 1.275,30.625 12.575,41.925
+5 on Bottom Layer "+5_L02_P017" (solid, pour order 17): 17.5,7.1 14.5,7.1 7.3,14.3 7.3,20.9 8.6,22.2 14.8,22.2 17.5,19.5
Fan- on Top Layer "FAN-_L01_P019" (solid, pour order 19): 32.05,44.775 32.05,39.9 26.475,34.325 26.475,31.05 25.325,31.05 25.325,36.4 29.475,40.55 29.475,44.775
+5 on Top Layer "+5_L01_P014" (solid, pour order 14): 17.2,39.7 10.1,39.7 10.1,43.4 10.2,43.5 17.6,43.5 17.6,40.1
GND on Top Layer "GND_L01_P012" (solid, pour order 12): 20.1,30.7 20.1,34.2 24.9,34.2 25,34.3 25,30.7 25,34.3 25,30.7
VCC on Top Layer "VCC_L01_P001" (solid, pour order 1): 21,12.273 21,11.2 16.7,10.7 16.7,12.273

## Silkscreen, mask and mechanical layers (free items; w line width, h text height)
Top Overlay:
  text "MindCloud" at 6.5,43.644 h4
  text "PIR" at 41.4,40.45 h1 r90
  text "SCL" at 36.139,40.2 h1 r90
  text "Fan-" at 31.14,39.95 h1 r90
  text "Fan+" at 33.64,39.95 h1 r90
  text "servo" at 43.89,39.7 h1 r90
  text "AREF" at 38.9,39.5 h1 r90
  text "ON" at 56.914,22.7 h1 r90
  text "RX" at 28.5,20.2 h1
  text "TX" at 28.5,18.1 h1
  text "Lighting System" at 48.212,15.638 h1
  text "Vin" at 22.8,4.601 h1 r90
  text "GND" at 25.389,4.6 h1 r90
  text "GND" at 27.889,4.6 h1 r90
  text "5V" at 30.489,4.6 h1 r90
  text "KP1" at 33,4.6 h1 r90
  text "KP2" at 35.6,4.6 h1 r90
  text "KP3" at 39.439,4.6 h1 r90
  text "KP4" at 41.95,4.6 h1 r90
  text "KP5" at 44.539,4.6 h1 r90
  text "KP6" at 47.039,4.6 h1 r90
  text "KP7" at 49.65,4.6 h1 r90
  text "KP8" at 52.139,4.6 h1 r90
  text "TEAM 8" at 5.8,0.744 h4
Mechanical 1:
  the board outline again, w0.5